# Altium PCB Inc_filter_v2.PcbDoc (part 3 of 4)
Units mm, origin at the board's own origin, x right, y up, seen from the top; angles counter-clockwise.
Board outline 339.6 x 339.6 mm, 2 copper layers (Top Layer, Bottom Layer); 640 components, 290 nets, 1708 pads, 357 vias.
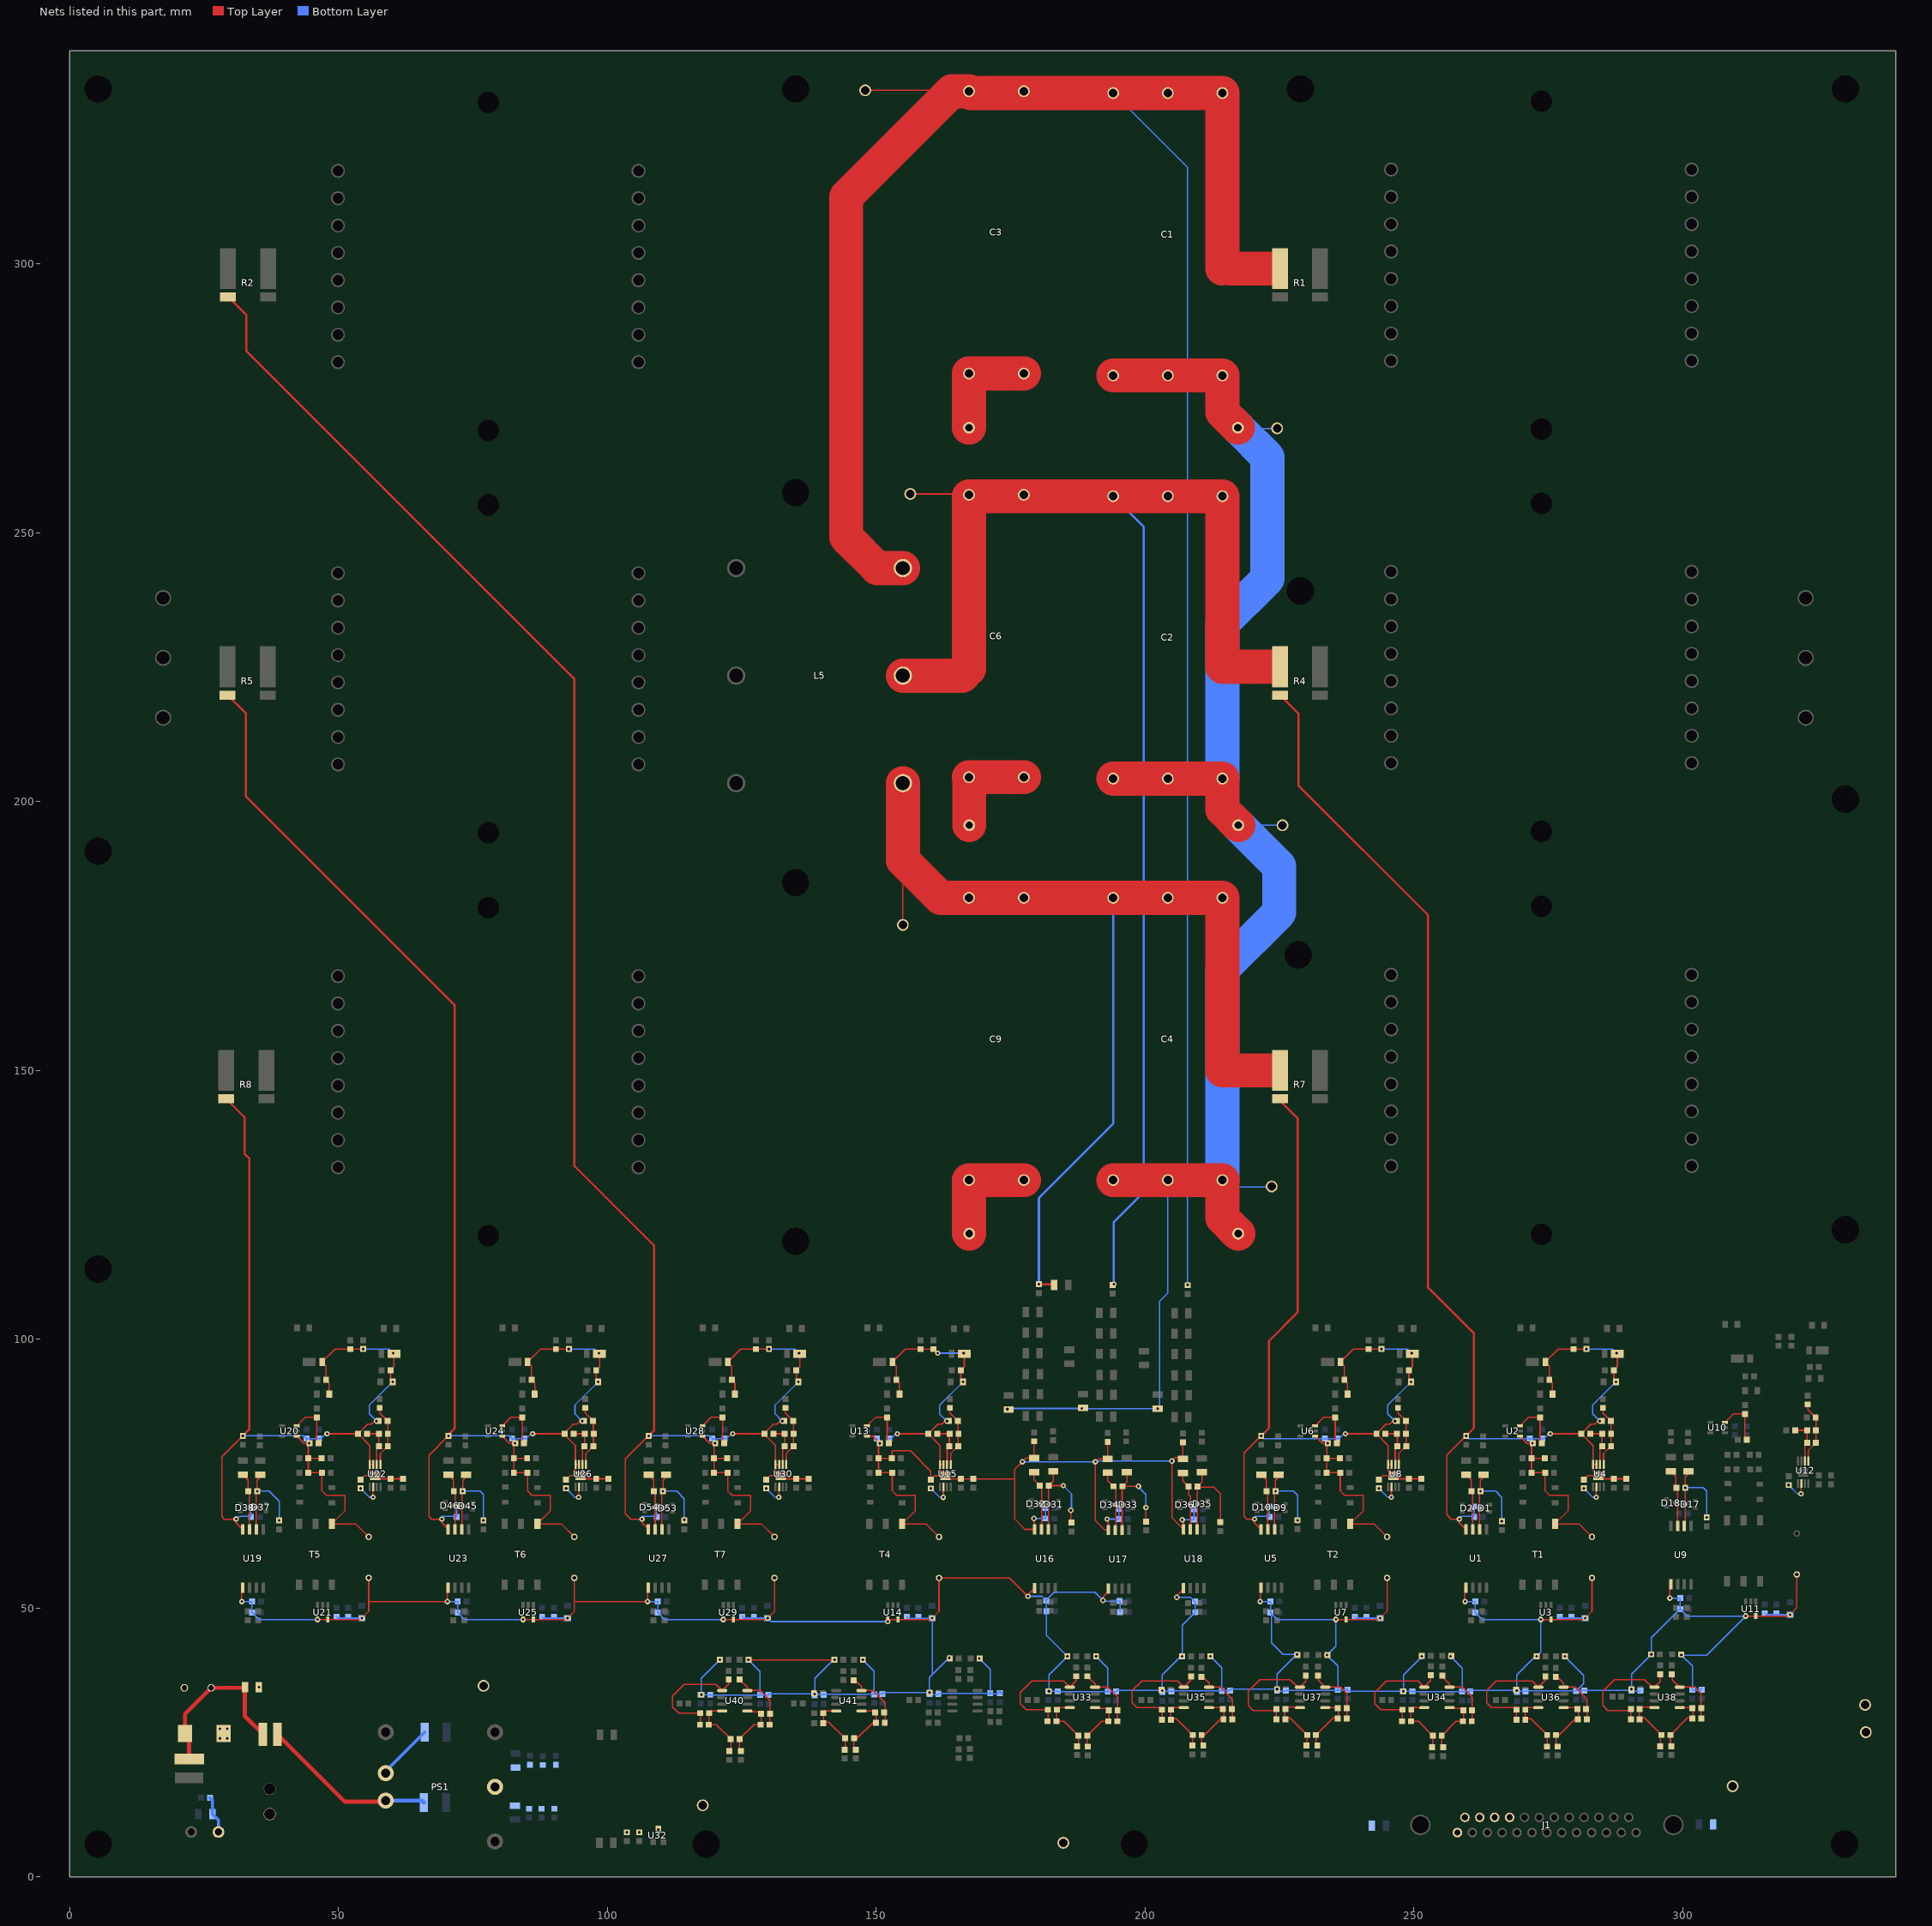
[diagram p3: the nets of this part, all layers, seen from the top]

## Via types
v1: diameter 1.016, hole 0.508, Top Layer to Bottom Layer, 354 vias
v2: diameter 1.27, hole 0.762, Top Layer to Bottom Layer, 3 vias

## Nets (pads, with @x,y where several pads share a name; then routed paths per layer and width w, separated by ;. In a path a pad name is that pad's centre, name@x,y a point inside that pad or via, vN(x,y) a via of type N, cw(c..) or ccw(c..) an arc to the next point about the centre after c; other vN are vias at no path point) (continued)
GND_IA2: C170.1 C172.1 C175.2 C179.1 C180.1 C181.1 C182.1 C183.1 C184.2 C185.2 C186.1 C187.1 C188.1 C189.1 C191.1 C192.1 C193.1 C194.1 D57.2 D60.1 FB27.1 R2.2 R94.1 R100.1 R102.1 T7.4 U27.4 U28.1 U30.3 U30.4 U30.9 | length 391.2
  Top Layer w0.2: U27.4@107.62,64.671 106.426,65.865 v1(106.426,66.548) 104.394,66.548 103.378,67.564 103.378,77.747 v1(107.671,82.04) ; U28.1@117.689,81.981 119.025,80.645 v1(120.015,80.645)
  Top Layer w0.254: v1(120.015,80.645) 120.015,80.574 119.831,80.39 C180.1@119.831,77.851 ; C185.2@122.309,77.851 C180.1@119.831,77.851 ; v1(123.324,82.423) R94.1@129.103,82.423 ; C183.1@123.712,89.789 123.712,91.877 C182.1@123.133,92.456 123.133,95.022 D57.2@122.397,95.758 124.81,98.171 R100.1@127.642,98.171 R100.1@127.642,98.171 R102.1@130.055,98.172 130.054,98.171 v1(130.048,98.171) ; C194.1@129.547,73.913 130.251,74.617 U30.9@132.255,74.617 ; C175.2@131.071,63.246 128.651,65.666 T7.4@124.215,65.666 126.626,68.077 126.626,70.993 123.197,70.993 122.372,71.818 C184.2@122.372,75.184 C179.1@119.831,75.184 C180.1@119.831,77.851 ; U30.3@131.999,76.648 U30.3@131.93,76.717 U30.4@131.28,76.717 ; C193.1@132.913,84.836 132.849,84.772 v1(132.532,84.772) 132.341,84.963 131.579,84.201 130.881,84.201 R94.1@129.103,82.423 ; C192.1@135.262,91.821 v1(135.516,92.075) 135.135,92.456 C191.1@135.135,94.234 135.77,94.869 D60.1@135.77,97.282 v1(135.643,97.409) ; C189.1@137.421,74.041 132.831,74.041 U30.9@132.255,74.617 ; R94.1@129.103,82.423 131.28,80.246 U30.4@131.28,76.717 ; U30.4@131.28,76.717 131.28,75.592 U30.9@132.255,74.617
  Top Layer w0.4: R2.2@29.464,293.825 32.893,290.396 32.893,283.754 93.885,222.762 93.885,132.211 108.712,117.384 108.712,83.081 v1(107.671,82.04)
  Bottom Layer w0.2: v1(106.426,66.548) 106.426,66.953 106.553,67.08 109.093,67.08 C172.1@109.195,66.979 C170.1@109.195,68.909 ; v1(107.671,82.04) 119.002,82.04 119.507,81.535 C186.1@119.514,81.535 C187.1@121.8,81.535
  Bottom Layer w0.254: C186.1@119.514,81.535 119.514,81.217 120.015,80.716 v1(120.015,80.645) ; C187.1@121.8,81.535 122.182,81.535 123.07,82.423 v1(123.324,82.423) ; v1(130.048,98.171) 134.881,98.171 v1(135.643,97.409) ; v1(132.532,84.772) 131.198,86.106 131.198,87.757 v1(135.516,92.075)
GND_IB1: C10.1 C12.1 C15.2 C19.1 C20.1 C21.1 C22.1 C23.1 C24.2 C25.2 C26.1 C27.1 C28.1 C29.1 C31.1 C32.1 C33.1 C34.1 D5.2 D8.1 FB2.1 R4.2 R15.1 R17.1 R27.1 T1.4 U1.4 U2.1 U4.3 U4.4 U4.9 | length 298.5
  Top Layer w0.2: U1.4@259.639,64.671 258.445,65.865 v1(258.445,66.548) 256.921,66.548 256.11,67.359 256.11,78.46 v1(259.69,82.04) ; U2.1@269.708,81.981 271.044,80.645 v1(272.034,80.645)
  Top Layer w0.254: v1(272.034,80.645) 272.034,80.574 271.85,80.39 C20.1@271.85,77.851 ; C25.2@274.328,77.851 C20.1@271.85,77.851 ; v1(275.343,82.423) R27.1@281.115,82.423 R27.1@281.122,82.423 ; C23.1@275.731,89.789 275.731,91.877 C22.1@275.152,92.456 275.152,95.022 D5.2@274.416,95.758 276.829,98.171 R15.1@279.661,98.171 R15.1@279.661,98.171 R17.1@282.074,98.172 282.073,98.171 v1(282.067,98.171) ; C34.1@281.566,73.913 282.27,74.617 U4.9@284.274,74.617 ; C15.2@283.09,63.246 280.67,65.666 T1.4@276.234,65.666 278.645,68.077 278.645,70.993 275.216,70.993 274.391,71.818 C24.2@274.391,75.184 C19.1@271.85,75.184 C20.1@271.85,77.851 ; U4.3@284.018,76.648 U4.3@283.949,76.717 U4.4@283.299,76.717 ; C33.1@284.932,84.836 284.868,84.772 v1(284.551,84.772) 284.36,84.963 283.598,84.201 282.9,84.201 R27.1@281.122,82.423 ; C32.1@287.281,91.821 v1(287.535,92.075) 287.154,92.456 C31.1@287.154,94.234 287.789,94.869 D8.1@287.789,97.282 v1(287.662,97.409) ; C29.1@289.44,74.041 284.85,74.041 U4.9@284.274,74.617 ; R27.1@281.122,82.423 283.299,80.246 U4.4@283.299,76.717 ; U4.4@283.299,76.717 283.299,75.592 U4.9@284.274,74.617
  Top Layer w0.4: R4.2@225.067,219.784 228.505,216.346 228.505,202.95 252.603,178.852 252.603,109.601 261.144,101.06 261.144,83.494 v1(259.69,82.04)
  Bottom Layer w0.2: v1(258.445,66.548) 258.445,66.953 258.572,67.08 261.112,67.08 C12.1@261.214,66.979 C10.1@261.214,68.909 ; v1(259.69,82.04) 260.195,81.535 C26.1@271.533,81.535 C27.1@273.819,81.535
  Bottom Layer w0.254: C26.1@271.533,81.535 271.533,81.217 272.034,80.716 v1(272.034,80.645) ; C27.1@273.819,81.535 274.201,81.535 275.089,82.423 v1(275.343,82.423) ; v1(282.067,98.171) 286.9,98.171 v1(287.662,97.409) ; v1(284.551,84.772) 283.217,86.106 283.217,87.757 v1(287.535,92.075)
GND_IB2: C145.1 C147.1 C150.2 C154.1 C155.1 C156.1 C157.1 C158.1 C159.2 C160.2 C161.1 C162.1 C163.1 C164.1 C166.1 C167.1 C168.1 C169.1 D49.2 D52.1 FB23.1 R5.2 R91.1 R93.1 R103.1 T6.4 U23.4 U24.1 U26.3 U26.4 U26.9 | length 301.2
  Top Layer w0.2: U23.4@70.402,64.671 69.208,65.865 v1(69.208,66.548) 67.31,66.548 66.802,67.056 66.802,78.389 v1(70.453,82.04) ; U24.1@80.471,81.981 81.807,80.645 v1(82.797,80.645)
  Top Layer w0.254: v1(82.797,80.645) 82.797,80.574 82.613,80.39 C155.1@82.613,77.851 ; C160.2@85.091,77.851 C155.1@82.613,77.851 ; v1(86.106,82.423) R103.1@91.885,82.423 ; C158.1@86.494,89.789 86.494,91.877 C157.1@85.915,92.456 85.915,95.022 D49.2@85.179,95.758 87.592,98.171 R91.1@90.424,98.171 R91.1@90.424,98.171 R93.1@92.837,98.172 R93.1@92.837,98.172 v1(92.83,98.171) ; C169.1@92.329,73.913 93.033,74.617 U26.9@95.037,74.617 ; C150.2@93.853,63.246 91.433,65.666 T6.4@86.997,65.666 89.408,68.077 89.408,70.993 85.979,70.993 85.154,71.818 C159.2@85.154,75.184 C154.1@82.613,75.184 C155.1@82.613,77.851 ; U26.3@94.781,76.648 U26.3@94.712,76.717 U26.4@94.062,76.717 ; C168.1@95.695,84.836 95.631,84.772 v1(95.314,84.772) 95.123,84.963 94.361,84.201 93.663,84.201 R103.1@91.885,82.423 ; C167.1@98.044,91.821 v1(98.298,92.075) 97.917,92.456 C166.1@97.917,94.234 98.552,94.869 D52.1@98.552,97.282 v1(98.425,97.409) ; C164.1@100.203,74.041 95.613,74.041 U26.9@95.037,74.617 ; R103.1@91.885,82.423 94.062,80.246 U26.4@94.062,76.717 ; U26.4@94.062,76.717 94.062,75.592 U26.9@95.037,74.617
  Top Layer w0.4: R5.2@29.36,219.784 32.798,216.346 32.798,200.918 71.625,162.091 71.625,83.436 70.453,82.264 v1(70.453,82.04)
  Bottom Layer w0.2: v1(69.208,66.548) 69.208,66.953 69.335,67.08 71.875,67.08 C147.1@71.977,66.979 C145.1@71.977,68.909 ; v1(70.453,82.04) 81.784,82.04 82.289,81.535 C161.1@82.296,81.535 C162.1@84.582,81.535
  Bottom Layer w0.254: C161.1@82.296,81.535 82.296,81.217 82.797,80.716 v1(82.797,80.645) ; C162.1@84.582,81.535 84.964,81.535 85.852,82.423 v1(86.106,82.423) ; v1(92.83,98.171) 97.663,98.171 v1(98.425,97.409) ; v1(95.314,84.772) 93.98,86.106 93.98,87.757 v1(98.298,92.075)
GND_IC1: C35.1 C37.1 C40.2 C44.1 C45.1 C46.1 C47.1 C48.1 C49.2 C50.2 C51.1 C52.1 C53.1 C54.1 C56.1 C57.1 C58.1 C59.1 D13.2 D16.1 FB6.1 R7.2 R18.1 R24.1 R26.1 T2.4 U5.4 U6.1 U8.3 U8.4 U8.9 | length 211.7
  Top Layer w0.2: U5.4@221.539,64.671 220.345,65.865 v1(220.345,66.548) 218.948,66.548 218.391,67.105 218.391,78.841 v1(221.59,82.04) ; U6.1@231.608,81.981 232.944,80.645 v1(233.934,80.645)
  Top Layer w0.254: v1(233.934,80.645) 233.934,80.574 233.75,80.39 C45.1@233.75,77.851 ; C50.2@236.228,77.851 C45.1@233.75,77.851 ; v1(237.243,82.423) R18.1@243.022,82.423 ; C48.1@237.631,89.789 237.631,91.877 C47.1@237.052,92.456 237.052,95.022 D13.2@236.316,95.758 238.729,98.171 R24.1@241.561,98.171 R24.1@241.561,98.171 R26.1@243.974,98.172 243.973,98.171 v1(243.967,98.171) ; C59.1@243.466,73.913 244.17,74.617 U8.9@246.174,74.617 ; C40.2@244.99,63.246 242.57,65.666 T2.4@238.134,65.666 240.545,68.077 240.545,70.993 237.116,70.993 236.291,71.818 C49.2@236.291,75.184 C44.1@233.75,75.184 C45.1@233.75,77.851 ; U8.3@245.918,76.648 U8.3@245.849,76.717 U8.4@245.199,76.717 ; C58.1@246.832,84.836 246.768,84.772 v1(246.451,84.772) 246.26,84.963 245.498,84.201 244.8,84.201 R18.1@243.022,82.423 ; C57.1@249.181,91.821 v1(249.435,92.075) 249.054,92.456 C56.1@249.054,94.234 249.689,94.869 D16.1@249.689,97.282 v1(249.562,97.409) ; C54.1@251.34,74.041 246.75,74.041 U8.9@246.174,74.617 ; R18.1@243.022,82.423 245.199,80.246 U8.4@245.199,76.717 ; U8.4@245.199,76.717 245.199,75.592 U8.9@246.174,74.617
  Top Layer w0.4: v1(221.59,82.04) 223.012,83.462 223.012,99.655 228.346,104.989 228.346,141.097 225.067,144.376 R7.2@225.067,144.727
  Bottom Layer w0.2: v1(220.345,66.548) 220.345,66.953 220.472,67.08 223.012,67.08 C37.1@223.114,66.979 C35.1@223.114,68.909 ; v1(221.59,82.04) 222.095,81.535 C51.1@233.433,81.535 C52.1@235.719,81.535
  Bottom Layer w0.254: C51.1@233.433,81.535 233.433,81.217 233.934,80.716 v1(233.934,80.645) ; C52.1@235.719,81.535 236.101,81.535 236.989,82.423 v1(237.243,82.423) ; v1(243.967,98.171) 248.8,98.171 v1(249.562,97.409) ; v1(246.451,84.772) 245.117,86.106 245.117,87.757 v1(249.435,92.075)
GND_IC2: C120.1 C122.1 C125.2 C129.1 C130.1 C131.1 C132.1 C133.1 C134.2 C135.2 C136.1 C137.1 C138.1 C139.1 C141.1 C142.1 C143.1 C144.1 D41.2 D44.1 FB19.1 R8.2 R82.1 R84.1 R92.1 T5.4 U19.4 U20.1 U22.3 U22.4 U22.9 | length 210.8
  Top Layer w0.2: U19.4@32.175,64.671 30.981,65.865 v1(30.981,66.548) 28.829,66.548 28.321,67.056 28.321,78.135 v1(32.226,82.04) ; U20.1@42.244,81.981 43.58,80.645 v1(44.57,80.645)
  Top Layer w0.254: v1(44.57,80.645) 44.57,80.574 44.386,80.39 C130.1@44.386,77.851 ; C135.2@46.864,77.851 C130.1@44.386,77.851 ; v1(47.879,82.423) R92.1@53.658,82.423 ; C133.1@48.267,89.789 48.267,91.877 C132.1@47.688,92.456 47.688,95.022 D41.2@46.952,95.758 49.365,98.171 R82.1@52.197,98.171 R82.1@52.197,98.171 R84.1@54.61,98.172 R84.1@54.61,98.172 v1(54.603,98.171) ; C144.1@54.102,73.913 54.806,74.617 U22.9@56.81,74.617 ; C125.2@55.626,63.246 53.206,65.666 T5.4@48.77,65.666 51.181,68.077 51.181,70.993 47.752,70.993 46.927,71.818 C134.2@46.927,75.184 C129.1@44.386,75.184 C130.1@44.386,77.851 ; U22.3@56.554,76.648 U22.3@56.485,76.717 U22.4@55.835,76.717 ; C143.1@57.468,84.836 57.404,84.772 v1(57.087,84.772) 56.896,84.963 56.134,84.201 55.436,84.201 R92.1@53.658,82.423 ; C142.1@59.817,91.821 v1(60.071,92.075) 59.69,92.456 C141.1@59.69,94.234 60.325,94.869 D44.1@60.325,97.282 v1(60.198,97.409) ; C139.1@61.976,74.041 57.386,74.041 U22.9@56.81,74.617 ; R92.1@53.658,82.423 55.835,80.246 U22.4@55.835,76.717 ; U22.4@55.835,76.717 55.835,75.592 U22.9@56.81,74.617
  Top Layer w0.4: R8.2@29.106,144.727 32.544,141.289 32.544,134.461 32.816,134.189 32.852,134.189 33.401,133.64 33.401,83.215 v1(32.226,82.04)
  Bottom Layer w0.2: v1(30.981,66.548) 30.981,66.953 31.034,67.007 31.705,67.007 31.779,67.08 33.648,67.08 C122.1@33.75,66.979 C120.1@33.75,68.909 ; v1(32.226,82.04) 43.557,82.04 44.062,81.535 C136.1@44.069,81.535 C137.1@46.355,81.535
  Bottom Layer w0.254: C136.1@44.069,81.535 44.069,81.217 44.57,80.716 v1(44.57,80.645) ; C137.1@46.355,81.535 46.737,81.535 47.625,82.423 v1(47.879,82.423) ; v1(54.603,98.171) 59.436,98.171 v1(60.198,97.409) ; v1(57.087,84.772) 55.753,86.106 55.753,87.757 v1(60.071,92.075)
GND_LV: C11.2 C13.2 C15.1 C16.1 C17.1 C18.1 C36.2 C38.2 C40.1 C41.1 C42.1 C43.1 C61.2 C63.2 C65.1 C66.1 C67.1 C68.1 C85.1 C86.1 C87.1 C88.1 C106.2 C108.2 C111.2 C113.2 C116.2 C118.2 C121.2 C123.2 C125.1 C126.1 C127.1 C128.1 C146.2 C148.2 C150.1 C151.1 C152.1 C153.1 C171.2 C173.2 C175.1 C176.1 C177.1 C178.1 C196.1 C197.2 C200.1 C201.1 C202.1 C203.2 C204.2 C205.2 C208.1 C209.1 C212.1 C213.1 C214.1 C215.1 C216.1 C217.1 C218.2 C219.2 C220.2 C221.2 C226.1 C227.1 C228.1 C229.1 C230.1 C231.1 C232.2 C233.2 C234.2 C235.2 C240.1 C241.1 C242.1 C243.1 C244.1 C245.1 C246.2 C247.2 C248.2 C249.2 C255.1 C256.1 C257.1 C258.2 C259.2 C262.1 C263.1 C264.1 C265.2 C266.2 C269.1 C270.1 C271.1 C272.2 C273.2 J1.1 J1.22 J1.23 J1.24 J1.25 pad.2 pad.3 pad.4 PS1.4 R110.2 R111.2 R116.2 R118.2 R126.2 R127.2 R132.2 R134.2 R142.2 R143.2 R148.2 R150.2 R155.2 R158.2 R163.2 R166.2 R171.2 R174.2 R199.2 R200.1 TP7.1 TP8.1 TP9.1 TP10.1 TP11.1 TP12.1 U1.5 U3.4 U3.5 U5.5 U7.4 U7.5 U9.5 U11.4 U11.5 U14.4 U14.5 U16.5 U17.5 U18.5 U19.5 U21.4 U21.5 U23.5 U25.4 U25.5 U27.5 U29.4 U29.5 U32.3 | length 778.2
  Top Layer w0.2: v1(32.022,51.231) 32.022,53.618 U19.5@32.175,53.771 ; 55.626,51.181 55.676,51.231 v1(70.249,51.231) 70.249,53.618 U23.5@70.402,53.771 ; 93.853,51.181 93.903,51.231 v1(107.467,51.231) 107.467,53.618 U27.5@107.62,53.771 ; v1(120.905,40.387) R158.2@120.906,40.386 ; C85.1@161.671,55.619 174.789,55.619 v1(178.211,52.197) ; v1(163.577,40.767) R174.2@163.958,40.767 ; v1(185.547,41.022) v1(185.547,41.022) ; v1(221.386,51.231) 221.386,53.618 U5.5@221.539,53.771 ; v1(228.219,41.402) R148.2@228.6,41.402 ; v1(251.46,41.022) v1(251.46,41.022) ; v1(259.486,51.231) 259.486,53.618 U1.5@259.639,53.771 ; v1(294.132,41.402) R150.2@294.513,41.402 ; v1(297.579,51.866) 297.579,54.253 U9.5@297.732,54.406
  Top Layer w0.254: v1(46.106,47.879) U21.5@48.006,47.879 54.102,47.879 v1(54.356,48.133) 55.626,49.403 55.626,51.181 C125.1@55.626,55.626 ; v1(84.333,47.879) U25.5@86.233,47.879 92.329,47.879 v1(92.583,48.133) 93.853,49.403 93.853,51.181 C150.1@93.853,55.626 ; v1(121.551,47.879) U29.5@123.451,47.879 129.547,47.879 v1(129.801,48.133) 131.071,49.403 C175.1@131.071,55.626 ; v1(126.239,40.386) v1(142.242,40.386) ; U14.4@152.151,47.872 U14.5@154.051,47.872 160.147,47.872 v1(160.401,48.126) 161.671,49.396 C85.1@161.671,55.619 ; v1(178.211,52.197) 178.211,52.473 U16.5@179.481,53.743 ; v1(192.151,51.435) 192.151,52.09 193.166,53.105 U17.5@193.166,53.615 ; v1(205.867,52.006) 205.867,52.282 U18.5@207.137,53.552 ; v1(235.47,47.879) U7.5@237.37,47.879 243.466,47.879 v1(243.72,48.133) 244.99,49.403 C40.1@244.99,55.626 ; v1(273.558,47.879) U3.4@273.57,47.879 U3.5@275.47,47.879 281.566,47.879 v1(281.82,48.133) 283.09,49.403 C15.1@283.09,55.626 ; v1(311.663,48.514) U11.5@313.563,48.514 319.659,48.514 v1(319.913,48.768) 321.183,50.038 C65.1@321.183,56.261
  Top Layer w0.4: v1(152.151,47.498) U14.4@152.151,47.872
  Bottom Layer w0.2: v1(32.022,51.231) C123.2@33.941,51.231 C121.2@33.941,49.199 35.26,47.879 v1(46.106,47.879) ; v1(70.249,51.231) C148.2@72.168,51.231 C146.2@72.168,49.199 73.487,47.879 v1(84.333,47.879) ; v1(107.467,51.231) C173.2@109.386,51.231 C171.2@109.386,49.199 110.705,47.879 v1(121.551,47.879) 122.059,47.879 ; v1(120.905,40.387) 117.477,36.959 v1(117.477,33.909) v1(117.477,33.909) C257.1@119.127,33.908 119.19,33.845 C258.2@128.398,33.845 ; v1(126.239,40.386) 128.398,38.227 C258.2@128.398,33.845 ; v1(142.242,40.386) 141.987,40.386 138.558,36.957 v1(138.558,34.037) ; v1(147.511,40.386) 149.607,38.29 149.607,34.162 C265.2@149.702,34.067 ; C265.2@149.607,33.972 140.146,33.972 140.082,33.908 138.687,33.908 v1(138.558,34.037) ; C265.2@149.733,34.036 C266.2@151.131,34.035 151.385,34.29 v1(159.895,34.29) ; C271.1@161.545,33.908 160.277,33.908 v1(159.895,34.29) ; C271.1@161.545,34.035 161.672,34.162 C273.2@171.197,34.162 ; v1(163.577,40.767) 159.895,37.085 v1(159.895,34.29) ; v1(169.165,40.64) 171.197,38.608 C273.2@171.197,34.162 ; C272.2@172.975,34.48 172.531,34.036 171.197,34.036 C273.2@171.197,34.162 ; C108.2@181.577,51.435 183.101,52.959 190.627,52.959 v1(192.151,51.435) ; v1(185.547,41.022) 182.119,37.594 v1(182.119,34.544) 182.12,34.543 C215.1@183.769,34.543 183.832,34.48 C218.2@193.04,34.48 ; v1(190.881,41.021) 193.04,38.862 C218.2@193.04,34.48 ; C229.1@204.724,34.543 203.329,34.543 v1(203.2,34.672) ; C229.1@204.851,34.48 204.978,34.607 C232.2@214.249,34.607 ; C116.2@209.297,49.212 206.884,46.799 v1(206.884,41.021) 206.629,41.021 203.2,37.592 v1(203.2,34.672) ; v1(212.153,41.021) 214.249,38.925 214.249,34.797 C232.2@214.344,34.702 ; C232.2@214.375,34.671 C233.2@215.773,34.67 ; C233.2@215.773,34.67 216.028,34.925 v1(224.537,34.925) ; v1(221.386,51.231) C38.2@223.305,51.231 C36.2@223.305,49.199 C36.2@223.52,48.983 ; C243.1@226.187,34.543 224.919,34.543 v1(224.537,34.925) ; C243.1@226.187,34.67 235.838,34.67 C247.2@235.839,34.671 ; C246.2@237.617,34.797 237.87,34.544 v1(248.032,34.544) ; C246.2@237.617,35.115 237.173,34.671 C247.2@235.839,34.671 ; v1(251.46,41.022) 248.032,37.594 v1(248.032,34.544) ; v1(256.794,41.021) 258.953,38.862 C220.2@258.953,34.48 ; v1(259.486,51.231) C13.2@261.405,51.231 C11.2@261.405,49.199 262.724,47.879 v1(273.558,47.879) 273.558,41.806 273.57,41.794 v1(272.797,41.021) 272.542,41.021 269.113,37.592 v1(269.113,34.672) ; C231.1@270.637,34.543 269.242,34.543 v1(269.113,34.672) ; C231.1@270.764,34.48 270.891,34.607 C234.2@280.162,34.607 ; v1(278.066,41.021) 281.559,37.528 281.559,36.004 C234.2@280.257,34.702 ; C234.2@280.288,34.671 C235.2@281.686,34.67 ; C235.2@281.686,34.67 290.195,34.67 v1(290.45,34.925) 290.45,37.72 v1(294.132,41.402) 294.132,44.468 C61.2@299.498,49.834 ; C244.1@290.832,34.543 C245.1@292.1,34.543 ; v1(297.579,51.866) C63.2@299.498,51.866 C61.2@299.498,49.834 ; C248.2@303.53,35.115 303.086,34.671 301.752,34.671 C249.2@301.752,34.797 301.752,39.243 v1(299.72,41.275) 304.424,41.275 v1(311.663,48.514) 300.817,48.514 C61.2@299.498,49.834 ; C258.2@128.398,33.845 C259.2@129.922,33.845 130.114,34.037 v1(138.558,34.037) ; C218.2@193.04,34.48 C219.2@194.564,34.48 194.756,34.672 v1(203.2,34.672) ; C36.2@223.52,48.983 223.52,43.561 225.679,41.402 v1(228.219,41.402) 224.537,37.72 v1(224.537,34.925) ; C36.2@223.52,48.983 224.624,47.879 v1(235.47,47.879) 235.47,42.938 v1(233.807,41.275) 235.839,39.243 C247.2@235.839,34.797 C247.2@235.839,34.671 ; v1(248.032,34.544) 248.033,34.543 C217.1@249.682,34.543 249.745,34.48 C220.2@258.953,34.48 ; C220.2@258.953,34.48 260.223,34.48 260.415,34.672 v1(269.113,34.672)
  Bottom Layer w0.254: C128.1@49.657,48.387 49.911,48.133 v1(54.356,48.133) ; C153.1@87.884,48.387 88.138,48.133 v1(92.583,48.133) ; C178.1@125.102,48.387 125.356,48.133 v1(129.801,48.133) 130.436,47.498 v1(152.151,47.498) ; C88.1@155.702,48.38 155.956,48.126 v1(160.401,48.126) C87.1@160.401,48.119 160.401,37.846 ; v1(178.211,52.197) 180.815,52.197 C108.2@181.577,51.435 181.641,51.371 C106.2@181.641,49.403 181.641,44.928 v1(185.547,41.022) ; v1(192.151,51.435) 192.151,51.308 192.15,51.307 C113.2@195.262,51.307 195.326,51.243 C111.2@195.326,49.275 ; v1(205.867,52.006) 208.471,52.006 C118.2@209.233,51.244 209.297,51.18 C116.2@209.297,49.212 ; C43.1@239.021,48.387 239.275,48.133 v1(243.72,48.133) ; v1(273.558,47.879) 276.613,47.879 C18.1@277.121,48.387 277.375,48.133 v1(281.82,48.133) ; C68.1@315.214,49.022 315.468,48.768 v1(319.913,48.768)
  Bottom Layer w0.4: C272.2@172.975,34.48 C272.2@173.292,34.163
GND_PH: C85.2 C89.1 C90.1 C91.1 C92.1 C93.1 C94.2 C95.2 C96.1 C97.1 C98.1 C99.1 C101.1 C102.1 C103.1 C104.1 C105.1 C107.1 C110.1 C112.1 C115.1 C117.1 D27.2 D30.1 R37.1 R39.1 R40.1 R51.1 R52.1 R63.1 R64.1 R75.1 R76.1 T4.4 U13.1 U15.3 U15.4 U15.9 U16.4 U17.4 U18.4 | length 230.6
  Top Layer w0.2: C95.2@152.909,77.844 152.909,79.247 156.338,79.247 160.147,75.438 C104.1@160.147,73.906
  Top Layer w0.254: U13.1@148.289,81.974 149.35,81.974 v1(150.686,80.638) 150.431,80.383 C90.1@150.431,77.844 ; C95.2@152.909,77.844 C90.1@150.431,77.844 ; v1(153.924,82.416) R40.1@159.703,82.416 ; C93.1@154.312,89.782 154.312,91.87 C92.1@153.733,92.449 153.733,95.015 D27.2@152.997,95.751 155.41,98.164 R37.1@158.242,98.164 158.243,98.165 R39.1@160.655,98.165 v1(161.418,97.402) ; C104.1@160.147,73.906 160.851,74.61 U15.9@162.855,74.61 ; C85.2@161.671,63.239 159.251,65.659 T4.4@154.815,65.659 157.226,68.07 157.226,70.986 153.797,70.986 152.972,71.811 C94.2@152.972,75.177 C89.1@150.431,75.177 C90.1@150.431,77.844 ; U15.3@162.599,76.641 U15.3@162.53,76.71 U15.4@161.88,76.71 ; C103.1@163.513,84.829 163.449,84.765 v1(163.132,84.765) 162.941,84.956 162.179,84.194 161.481,84.194 R40.1@159.703,82.416 ; C102.1@165.862,91.814 v1(166.116,92.068) 165.735,92.449 C101.1@165.735,94.227 166.37,94.862 D30.1@166.37,97.275 v1(166.243,97.402) ; v1(179.324,66.675) 179.324,64.8 U16.4@179.481,64.643 177.673,64.643 175.768,66.548 175.768,74.168 ; R51.1@179.354,81.027 R52.1@179.354,77.911 177.86,77.911 v1(177.165,77.216) 175.768,75.819 175.768,74.168 ; v1(192.913,66.548) 192.913,66.167 193.166,65.914 U17.4@193.166,64.515 192.533,64.515 190.754,66.294 v1(190.754,77.216) 191.321,77.783 R64.1@193.039,77.783 R63.1@193.039,80.899 ; v1(206.883,66.421) 207.137,66.167 U18.4@207.137,64.621 204.978,66.78 v1(204.978,77.343) 205.613,77.978 207.01,77.978 R75.1@207.01,80.836 ; R40.1@159.703,82.416 161.88,80.239 U15.4@161.88,76.71 ; U15.4@161.88,76.71 161.88,75.585 U15.9@162.855,74.61 ; U15.9@162.855,74.61 163.431,74.034 C99.1@168.021,74.034 175.634,74.034 175.768,74.168
  Bottom Layer w0.254: C96.1@150.114,81.528 150.114,81.21 v1(150.686,80.638) ; C97.1@152.4,81.528 152.782,81.528 153.67,82.416 v1(153.924,82.416) ; v1(161.418,97.402) v1(166.243,97.402) ; v1(163.132,84.765) 161.798,86.099 161.798,87.75 v1(166.116,92.068) ; v1(177.165,77.216) v1(190.754,77.216) 190.627,77.343 v1(204.978,77.343) ; v1(179.324,66.675) 181.196,66.675 181.323,66.802 C105.1@181.45,66.675 C107.1@181.45,68.58 ; v1(192.913,66.548) 195.134,66.548 C110.1@195.135,66.547 C112.1@195.135,68.452 ; v1(206.883,66.421) 209.043,66.421 C115.1@209.106,66.484 C117.1@209.106,68.389
GND_PWR: C5.2 C7.1 C195.1 C275.2 C276.2 D61.2 P1.2 pad.6 pad.7 pad.8 pad.9 pad.10 PS1.1 SW1.1 | length 17.6
  Bottom Layer w0.6: C276.2@26.098,14.732 26.573,14.257 C275.2@26.573,11.684 27.686,10.571 P1.2@27.686,8.382 ; PS1.1@58.801,19.304 58.801,19.703 C195.1@66.022,26.924
N_HV: C1.1 C1.2 C1.3 C2.1 C2.2 C2.3 C4.1 C4.2 C4.3 R3.1 R6.1 R9.1 R203.1 R206.1 R207.1 TP4.1 TP5.1 TP6.1 | length 334.6
  Top Layer w6.35: C4.1@194.066,129.587 C4.2@204.216,129.587 C4.3@214.366,129.587 214.366,122.565 R9.1@217.297,119.634 ; C2.1@194.066,204.255 C2.2@204.216,204.255 C2.3@214.366,204.255 214.366,198.511 R6.1@217.297,195.58 ; C1.1@194.066,279.22 C1.2@204.216,279.22 C1.3@214.366,279.22 214.366,272.387 R3.1@217.259,269.494
  Bottom Layer w0.254: v1(174.371,86.995) 174.498,87.122 v1(188.214,87.122) 188.244,87.092 v1(202.311,87.092) 202.438,86.965 202.438,86.868 202.692,87.122 202.692,107.061 204.216,108.585 C4.2@204.216,129.587 ; 214.366,128.27 TP6.1@224.409,128.27 ; R6.1@217.297,195.58 TP5.1@225.552,195.58 ; R3.1@217.386,269.367 TP4.1@224.536,269.367
  Bottom Layer w6.35: C4.3@214.366,129.587 214.366,168.773 224.917,179.324 224.917,187.96 R6.1@217.297,195.58 ; C2.3@214.366,204.255 214.366,233.035 222.758,241.427 222.758,263.995 217.386,269.367 R3.1@217.259,269.494
NetC1_4: C1.4 C1.5 C1.6 C3.3 C3.4 FB17.1 L5.3 R1.1 TP1.1 | length 435.5
  Top Layer w0.254: TP1.1@147.955,332.232 160.997,332.232 161.417,331.812
  Top Layer w0.4: FB17.1@207.899,110.045 v1(207.899,110.109)
  Top Layer w6.35: L5.3@154.952,243.393 150.18,243.393 144.399,249.174 144.399,312.42 164.045,332.066 C3.4@167.239,332.066 167.585,331.72 C1.6@194.066,331.72 C1.5@204.216,331.72 C1.4@214.366,331.72 214.366,299.095 ; 215.9,299.085 223.266,299.085
  Bottom Layer w0.254: C1.6@194.066,331.72 207.899,317.887 v1(207.899,110.109)
NetC2_4: C2.4 C2.5 C2.6 C6.3 C6.4 FB16.1 L5.2 R4.1 TP2.1 | length 296
  Top Layer w0.254: TP2.1@156.337,257.175 168.186,257.175 C6.4@168.255,257.244
  Top Layer w0.4: FB16.1@194.056,110.109 v1(194.183,110.236)
  Top Layer w6.35: L5.2@154.952,223.393 165.989,223.393 167.239,224.643 167.239,256.755 C2.6@194.066,256.755 C2.5@204.216,256.755 C2.4@214.366,256.755 214.366,225.044 223.266,225.044
  Bottom Layer w0.4: C2.6@194.066,256.755 199.771,251.05 199.771,127.381 194.183,121.793 v1(194.183,110.236)
NetC3_1: C3.1 C3.2 R3.2 | length 20.3
  Top Layer w6.35: R3.2@167.259,269.494 167.259,279.546 C3.1@167.239,279.566 C3.2@177.439,279.566
NetC4_4: C4.4 C4.5 C4.6 C9.3 C9.4 FB15.1 L5.1 R7.1 R201.1 TP3.1 | length 206.1
  Top Layer w0.254: TP3.1@154.94,177.038 154.94,184.404 155.321,184.785
  Top Layer w0.4: FB15.1@180.213,110.236 v1(180.243,110.236) 182.947,110.236 R201.1@183.074,110.109
  Top Layer w6.35: L5.1@154.952,203.393 154.952,189.091 161.956,182.087 C9.4@167.239,182.087 C9.3@177.439,182.087 C4.6@194.066,182.087 C4.5@204.216,182.087 C4.4@214.366,182.087 214.366,149.987 223.393,149.987
  Bottom Layer w0.4: v1(180.243,110.236) 180.243,126.268 194.066,140.091 C4.6@194.066,182.087
NetC5_1: C5.1 C7.2 D61.1 L8.2 L9.1 | length 32
  Top Layer w0.762: L8.2@22.225,21.915 22.225,25.908 D61.1@21.463,26.67 21.463,30.306 C5.1@26.336,35.179 C7.2@32.609,35.179 ; C7.2@32.609,35.306 C7.2@32.609,35.179 ; L9.1@35.941,26.543 32.609,29.875 C7.2@32.609,35.179
NetC6_1: C6.1 C6.2 R6.2 | length 19.2
  Top Layer w6.35: R6.2@167.297,195.58 167.297,204.451 C6.1@167.239,204.509 C6.2@177.439,204.509
NetC8_1: C8.1 L9.2 PS1.2 | length 32.7
  Top Layer w0.762: L9.2@38.641,26.543 51.181,14.003 58.58,14.003 PS1.2@58.801,14.224
  Bottom Layer w0.762: PS1.2@58.801,14.224 65.514,14.224 C8.1@65.895,13.843
NetC9_1: C9.1 C9.2 R9.2 | length 20.2
  Top Layer w6.35: R9.2@167.297,119.634 167.239,119.692 C9.1@167.239,129.587 C9.2@177.439,129.587
NetC14_1: C14.1 D1.3 R10.1 R11.2 U1.2 | length 18.7
  Top Layer w0.2: U1.2@262.179,64.671 262.179,71.17 ; v1(262.343,71.754) 262.343,73.798 262.941,74.396 R11.2@262.941,74.802
  Bottom Layer w0.2: v1(262.343,71.754) 265.177,71.754 266.319,70.612 v1(266.319,66.167)
NetC14_2: C14.2 D2.3 R14.2 U1.3 | length 10.8
  Top Layer w0.2: R14.2@259.69,75.047 R14.2@259.69,74.802 260.61,73.881 260.61,71.837 C14.2@260.693,71.754 ; U1.3@260.909,64.671 C14.2@260.909,71.754
NetC21_2: C21.2 FB3.1 U2.3 | length 9.3
  Top Layer w0.254: U2.3@269.708,83.881 271.298,85.471 FB3.1@273.438,85.471 273.438,80.962 C21.2@273.755,80.645
NetC30_1: C30.1 C33.2 FB4.1 R25.2 U4.1 | length 11.7
  Top Layer w0.254: FB4.1@285.122,87.249 285.122,86.296 C33.2@286.582,84.836 286.645,84.773 R25.2@286.645,82.423 286.646,82.422 C30.1@286.646,80.137 285.249,78.74 U4.1@285.249,76.717
NetC30_2: C30.2 R25.1 R27.2 U4.2 | length 8.1
  Top Layer w0.254: R27.2@282.772,82.423 R25.1@284.995,82.423 R25.1@284.995,82.423 C30.2@284.996,80.137 284.599,79.74 U4.2@284.599,76.717
NetC34_2: C34.2 U4.6 | length 5
  Top Layer w0.254: v1(283.88,70.612) 283.88,72.448 U4.6@283.949,72.517
  Bottom Layer w0.254: v1(281.566,72.263) 283.273,70.556 283.329,70.612 v1(283.88,70.612)
NetC39_1: C39.1 D9.3 R19.1 R20.2 U5.2 | length 18.9
  Top Layer w0.2: U5.2@224.079,64.671 224.079,71.17 ; v1(224.243,71.754) 224.243,73.798 224.841,74.396 R20.2@224.841,74.802
  Bottom Layer w0.2: v1(224.243,71.754) 227.585,71.754 228.346,70.993 v1(228.346,66.294)
NetC39_2: C39.2 D10.3 R23.2 U5.3 | length 10.8
  Top Layer w0.2: R23.2@221.59,75.047 R23.2@221.59,74.802 222.51,73.881 222.51,71.837 C39.2@222.593,71.754 ; U5.3@222.809,64.671 C39.2@222.809,71.754
NetC46_2: C46.2 FB7.1 U6.3 | length 9.3
  Top Layer w0.254: U6.3@231.608,83.881 233.198,85.471 FB7.1@235.338,85.471 235.338,80.962 C46.2@235.655,80.645
NetC55_1: C55.1 C58.2 FB8.1 R16.2 U8.1 | length 11.7
  Top Layer w0.254: FB8.1@247.022,87.249 247.022,86.296 C58.2@248.482,84.836 248.545,84.773 248.545,82.423 248.546,82.422 C55.1@248.546,80.137 247.149,78.74 U8.1@247.149,76.717
NetC55_2: C55.2 R16.1 R18.2 U8.2 | length 8.1
  Top Layer w0.254: R18.2@244.672,82.423 R16.1@246.825,82.423 246.895,82.423 246.896,82.422 C55.2@246.896,80.137 246.499,79.74 U8.2@246.499,76.717
NetC59_2: C59.2 U8.6 | length 5
  Top Layer w0.254: v1(245.78,70.612) 245.78,72.448 U8.6@245.849,72.517
  Bottom Layer w0.254: v1(243.466,72.263) 245.173,70.556 245.229,70.612 v1(245.78,70.612)
NetC64_1: C64.1 D17.3 R28.1 R29.2 U9.2 | length 19.9
  Top Layer w0.2: U9.2@300.272,65.306 300.436,65.47 v1(300.436,72.389) 300.436,74.433 301.034,75.031 R29.2@301.034,75.437 ; v1(304.419,66.865) R28.1@304.419,67.183
  Bottom Layer w0.2: v1(300.436,72.389) 303.783,72.389 303.784,72.39 304.419,71.755 v1(304.419,66.865)
NetC64_2: C64.2 D18.3 R32.2 U9.3 | length 10.9
  Top Layer w0.2: R32.2@297.783,75.682 R32.2@297.783,75.437 298.703,74.516 298.703,72.472 C64.2@298.786,72.389 299.002,72.174 U9.3@299.002,65.306
NetC71_2: C71.2 FB11.1 U10.3 | length 9.3
  Top Layer w0.254: U10.3@307.801,84.516 309.391,86.106 FB11.1@311.531,86.106 311.531,81.597 C71.2@311.848,81.28
NetC80_1: C80.1 C83.2 FB12.1 R34.2 U12.1 | length 11.7
  Top Layer w0.254: FB12.1@323.215,87.884 323.215,86.931 C83.2@324.675,85.471 324.738,85.408 R34.2@324.738,83.058 R34.2@324.738,83.058 C80.1@324.739,80.772 323.342,79.375 U12.1@323.342,77.352
NetC80_2: C80.2 R34.1 R36.2 U12.2 | length 8.1
  Top Layer w0.254: R36.2@320.865,83.058 R34.1@323.088,83.058 R34.1@323.088,83.058 C80.2@323.089,80.772 322.692,80.375 U12.2@322.692,77.352
NetC84_2: C84.2 U12.6 | length 5
  Top Layer w0.254: v1(321.973,71.247) 321.973,73.083 U12.6@322.042,73.152
  Bottom Layer w0.254: v1(319.659,72.898) 321.366,71.191 321.422,71.247 v1(321.973,71.247)
NetC91_2: C91.2 FB13.1 U13.3 | length 9.3
  Top Layer w0.254: U13.3@148.289,83.874 149.879,85.464 FB13.1@152.019,85.464 152.019,80.955 C91.2@152.336,80.638
NetC100_1: C100.1 C103.2 FB14.1 R38.2 U15.1 | length 11.7
  Top Layer w0.254: FB14.1@163.703,87.242 163.703,86.289 C103.2@165.163,84.829 165.226,84.766 165.226,82.416 165.227,82.415 C100.1@165.227,80.13 163.83,78.733 U15.1@163.83,76.71
NetC100_2: C100.2 R38.1 R40.2 U15.2 | length 8.2
  Top Layer w0.254: R40.2@161.353,82.416 163.633,82.416 163.577,82.36 C100.2@163.577,80.13 163.18,79.733 U15.2@163.18,76.71
NetC104_2: C104.2 U15.6 | length 5
  Top Layer w0.254: v1(162.461,70.605) 162.461,72.441 U15.6@162.53,72.51
  Bottom Layer w0.254: v1(160.147,72.256) 161.854,70.549 161.91,70.605 v1(162.461,70.605)
NetC109_1: C109.1 D31.3 R41.1 R44.2 U16.2 | length 21.6
  Top Layer w0.254: U16.2@182.021,64.643 182.021,72.708 C109.1@182.084,72.771 ; R44.2@182.91,75.438 182.91,73.597 C109.1@182.084,72.771 ; v1(184.785,72.771) 182.338,72.771 182.211,72.644 C109.1@182.084,72.771 ; v1(186.182,68.199) 186.182,66.039 R41.1@186.309,65.912
  Bottom Layer w0.254: v1(184.785,72.771) 186.309,71.247 186.309,68.326 v1(186.182,68.199)
NetC109_2: C109.2 D32.3 R52.2 U16.3 | length 11.2
  Top Layer w0.2: C109.2@180.434,72.771 180.751,72.454 U16.3@180.751,64.643
  Top Layer w0.254: R52.2@179.354,75.311 179.354,73.851 C109.2@180.434,72.771
NetC114_1: C114.1 D33.3 R53.1 R56.2 U17.2 | length 21.4
  Top Layer w0.254: U17.2@195.706,64.515 195.706,72.58 C114.1@195.769,72.643 ; R56.2@196.595,75.31 196.595,73.469 C114.1@195.769,72.643 ; v1(198.755,72.644) v1(198.755,72.644) C114.1@195.769,72.643 ; R53.1@200.152,66.103 v1(200.152,68.707)
  Bottom Layer w0.254: v1(198.755,72.644) 198.628,72.644 200.152,71.12 v1(200.152,68.707)
NetC114_2: C114.2 D34.3 R64.2 U17.3 | length 11.4
  Top Layer w0.2: R64.2@193.039,75.183 193.039,73.723 C114.2@194.119,72.643 194.564,72.198 194.564,64.643 U17.3@194.436,64.515
NetC119_1: C119.1 D35.3 R65.1 R68.2 U18.2 | length 21.1
  Top Layer w0.254: U18.2@209.677,64.621 209.677,72.517 C119.1@209.74,72.58 ; R68.2@210.566,75.247 210.566,73.406 C119.1@209.74,72.58 ; R65.1@213.995,65.976 213.995,71.247 212.725,72.517 209.803,72.517 C119.1@209.74,72.58
NetC119_2: C119.2 D36.3 R76.2 U18.3 | length 11.1
  Top Layer w0.2: R76.2@207.01,75.12 207.01,73.66 C119.2@208.09,72.58 208.09,71.056 208.407,70.739 U18.3@208.407,64.621
NetC124_1: C124.1 D37.3 R77.1 R78.2 U19.2 | length 18.2
  Top Layer w0.2: U19.2@34.715,64.671 D37.3@34.715,68.707 34.715,71.17 ; v1(34.879,71.754) 34.879,73.798 35.477,74.396 R78.2@35.477,74.802
  Bottom Layer w0.2: v1(34.879,71.754) 37.085,71.754 38.989,69.85 v1(38.989,66.294)
NetC124_2: C124.2 D38.3 R81.2 U19.3 | length 10.8
  Top Layer w0.2: R81.2@32.226,75.047 R81.2@32.226,74.802 33.146,73.881 33.146,71.837 C124.2@33.229,71.754
  Top Layer w0.254: U19.3@33.445,64.671 C124.2@33.445,71.754
NetC131_2: C131.2 FB20.1 U20.3 | length 9.3
  Top Layer w0.254: U20.3@42.244,83.881 43.834,85.471 FB20.1@45.974,85.471 45.974,80.962 C131.2@46.291,80.645
NetC140_1: C140.1 C143.2 FB21.1 R83.2 U22.1 | length 11.7
  Top Layer w0.254: FB21.1@57.658,87.249 57.658,86.296 C143.2@59.118,84.836 59.181,84.773 R83.2@59.181,82.423 R83.2@59.181,82.423 C140.1@59.182,80.137 57.785,78.74 U22.1@57.785,76.717
NetC140_2: C140.2 R83.1 R92.2 U22.2 | length 8.1
  Top Layer w0.254: R92.2@55.308,82.423 R83.1@57.531,82.423 R83.1@57.531,82.423 C140.2@57.532,80.137 57.135,79.74 U22.2@57.135,76.717
NetC144_2: C144.2 U22.6 | length 5
  Top Layer w0.254: v1(56.416,70.612) 56.416,72.448 U22.6@56.485,72.517
  Bottom Layer w0.254: v1(54.102,72.263) 55.809,70.556 55.865,70.612 v1(56.416,70.612)
NetC149_1: C149.1 D45.3 R86.1 R87.2 U23.2 | length 18.7
  Top Layer w0.2: U23.2@72.942,64.671 72.942,71.17 ; v1(73.106,71.754) 73.106,73.798 73.704,74.396 R87.2@73.704,74.802
  Bottom Layer w0.2: v1(73.106,71.754) 76.328,71.754 76.962,71.12 v1(76.962,66.294)
NetC149_2: C149.2 D46.3 R90.2 U23.3 | length 10.8
  Top Layer w0.2: R90.2@70.453,75.047 R90.2@70.453,74.802 71.373,73.881 71.373,71.837 C149.2@71.456,71.754 ; U23.3@71.672,64.671 C149.2@71.672,71.754
NetC156_2: C156.2 FB24.1 U24.3 | length 9.3
  Top Layer w0.254: U24.3@80.471,83.881 82.061,85.471 FB24.1@84.201,85.471 84.201,80.962 C156.2@84.518,80.645
NetC165_1: C165.1 C168.2 FB25.1 R101.2 U26.1 | length 11.7
  Top Layer w0.254: FB25.1@95.885,87.249 95.885,86.296 C168.2@97.345,84.836 97.408,84.773 97.408,82.423 97.409,82.422 C165.1@97.409,80.137 96.012,78.74 U26.1@96.012,76.717
NetC165_2: C165.2 R101.1 R103.2 U26.2 | length 8.1
  Top Layer w0.254: R103.2@93.535,82.423 R103.2@93.725,82.423 95.758,82.423 95.759,82.422 C165.2@95.759,80.137 95.362,79.74 U26.2@95.362,76.717
NetC169_2: C169.2 U26.6 | length 5
  Top Layer w0.254: v1(94.643,70.612) 94.643,72.448 U26.6@94.712,72.517
  Bottom Layer w0.254: v1(92.329,72.263) 94.036,70.556 94.092,70.612 v1(94.643,70.612)
NetC174_1: C174.1 D53.3 R95.1 R96.2 U27.2 | length 18.5
  Top Layer w0.2: U27.2@110.16,64.671 110.16,71.17 ; v1(110.324,71.754) 110.324,73.798 110.922,74.396 R96.2@110.922,74.802 ; v1(114.3,66.421) R95.1@114.427,66.294
  Bottom Layer w0.2: v1(110.324,71.754) 112.904,71.754 114.3,70.358 v1(114.3,66.421)
NetC174_2: C174.2 D54.3 R99.2 U27.3 | length 10.8
  Top Layer w0.2: R99.2@107.671,75.047 R99.2@107.671,74.802 108.591,73.881 108.591,71.837 C174.2@108.674,71.754
  Top Layer w0.254: U27.3@108.89,64.671 C174.2@108.89,71.754
NetC181_2: C181.2 FB28.1 U28.3 | length 9.3
  Top Layer w0.254: U28.3@117.689,83.881 119.279,85.471 FB28.1@121.419,85.471 121.419,80.962 C181.2@121.736,80.645
NetC190_1: C190.1 C193.2 FB29.1 R85.2 U30.1 | length 11.7
  Top Layer w0.254: FB29.1@133.103,87.249 133.103,86.296 C193.2@134.563,84.836 134.626,84.773 134.626,82.423 R85.2@134.627,82.422 C190.1@134.627,80.137 133.23,78.74 U30.1@133.23,76.717
NetC190_2: C190.2 R85.1 R94.2 U30.2 | length 8.1
  Top Layer w0.254: R94.2@130.753,82.423 R94.2@130.873,82.423 R85.1@132.977,82.422 R85.1@132.977,82.422 C190.2@132.977,80.137 132.58,79.74 U30.2@132.58,76.717
NetC194_2: C194.2 U30.6 | length 5
  Top Layer w0.254: v1(131.861,70.612) 131.861,72.448 U30.6@131.93,72.517
  Bottom Layer w0.254: v1(129.547,72.263) 131.254,70.556 131.31,70.612 v1(131.861,70.612)
NetC210_1: C210.1 R104.1 R112.1 R190.2 U33.5 | length 12.3
  Top Layer w0.2: R190.2@189.357,24.257 189.23,24.384 R112.1@189.23,26.289 191.897,28.956 C210.1@193.167,28.956 193.295,28.956 193.295,31.369 190.818,31.369 U33.5@190.691,31.496
NetC210_2: C210.2 R104.2 R108.1 U33.8 | length 12.1
  Top Layer w0.2: R108.1@189.23,37.338 190.691,35.877 U33.8@190.691,35.306 193.04,35.306 194.881,33.465 R104.2@194.881,30.988 194.881,29.02 C210.2@194.817,28.956
NetC211_1: C211.1 R105.1 R113.1 R189.2 U34.5 | length 12.5
  Top Layer w0.2: R189.2@255.397,24.129 255.143,24.383 R113.1@255.143,26.289 257.81,28.956 C211.1@259.08,28.956 259.208,28.956 259.208,31.369 256.731,31.369 U34.5@256.604,31.496
NetC211_2: C211.2 R105.2 R109.1 U34.8 | length 12.1
  Top Layer w0.2: R109.1@255.143,37.338 256.604,35.877 U34.8@256.604,35.306 258.953,35.306 260.794,33.465 R105.2@260.794,30.988 260.794,29.02 C211.2@260.73,28.956
NetC222_1: C222.1 R112.2 R117.1 R192.2 U33.4 | length 12
  Top Layer w0.2: U33.4@185.991,31.496 183.959,31.496 R117.1@183.578,31.115 183.515,31.052 C222.1@183.515,28.956 184.913,28.956 R112.2@187.58,26.289 187.58,24.575 R192.2@187.325,24.32
NetC222_2: C222.2 R114.1 R117.2 U33.1 | length 22.9
  Top Layer w0.2: C222.2@181.865,28.956 181.928,29.019 R117.2@181.928,31.115 177.927,31.115 176.784,32.258 176.784,34.29 178.943,36.449 184.848,36.449 U33.1@185.991,35.306 187.198,36.513 R114.1@187.198,37.338
NetC223_1: C223.1 R113.2 R119.1 R191.2 U34.4 | length 12.1
  Top Layer w0.2: U34.4@251.904,31.496 249.872,31.496 R119.1@249.491,31.115 249.428,31.052 C223.1@249.428,28.956 250.826,28.956 R113.2@253.493,26.289 253.493,24.257 R191.2@253.365,24.129
NetC223_2: C223.2 R115.1 R119.2 U34.1 | length 22.9
  Top Layer w0.2: C223.2@247.778,28.956 247.841,29.019 R119.2@247.841,31.115 243.84,31.115 242.697,32.258 242.697,34.29 244.856,36.449 250.761,36.449 U34.1@251.904,35.306 253.111,36.513 R115.1@253.111,37.338
NetC224_1: C224.1 R120.1 R128.1 R186.2 U35.5 | length 12.4
  Top Layer w0.2: R186.2@210.82,24.447 210.502,24.765 R128.1@210.502,26.416 211.074,26.416 214.122,29.464 214.63,29.464 214.63,31.623 214.503,31.496 U35.5@211.9,31.496
NetC224_2: C224.2 R120.2 R124.1 U35.8 | length 11.4
  Top Layer w0.2: R124.1@210.693,37.275 211.9,36.068 U35.8@211.9,35.306 213.995,35.306 216.28,33.021 C224.2@216.28,29.464
NetC225_1: C225.1 R121.1 R129.1 R185.2 U36.5 | length 12.6
  Top Layer w0.2: R185.2@276.733,24.256 276.415,24.574 R129.1@276.415,26.416 276.987,26.416 280.035,29.464 280.543,29.464 280.543,31.623 280.416,31.496 U36.5@277.813,31.496
NetC225_2: C225.2 R121.2 R125.1 U36.8 | length 11.4
  Top Layer w0.2: R125.1@276.606,37.275 277.813,36.068 U36.8@277.813,35.306 279.908,35.306 282.193,33.021 C225.2@282.193,29.464
NetC236_1: C236.1 R128.2 R133.1 R188.2 U35.4 | length 11.9
  Top Layer w0.2: U35.4@207.2,31.496 204.787,31.496 R133.1@204.787,31.115 204.787,29.527 204.724,29.464 205.804,29.464 R128.2@208.852,26.416 208.852,24.511 R188.2@208.788,24.447
NetC236_2: C236.2 R130.1 R133.2 U35.1 | length 23.6
  Top Layer w0.2: C236.2@203.074,29.464 203.137,29.527 R133.2@203.137,31.115 203.137,31.496 198.501,31.496 197.612,32.385 197.612,34.671 199.39,36.449 206.057,36.449 U35.1@207.2,35.306 208.534,36.64 R130.1@208.534,37.275
NetC237_1: C237.1 R129.2 R135.1 R187.2 U36.4 | length 12
  Top Layer w0.2: U36.4@273.113,31.496 270.7,31.496 R135.1@270.7,31.115 270.7,29.527 270.637,29.464 271.717,29.464 R129.2@274.765,26.416 274.765,24.32 R187.2@274.701,24.256
NetC237_2: C237.2 R131.1 R135.2 U36.1 | length 23.6
  Top Layer w0.2: C237.2@268.987,29.464 269.05,29.527 R135.2@269.05,31.115 269.05,31.496 264.414,31.496 263.525,32.385 263.525,34.671 265.303,36.449 271.97,36.449 U36.1@273.113,35.306 274.447,36.64 R131.1@274.447,37.275
NetC238_1: C238.1 R136.1 R144.1 R182.2 U37.5 | length 12.1
  Top Layer w0.2: R182.2@232.029,24.447 231.774,24.702 R144.1@231.774,26.416 234.949,29.591 235.903,29.591 235.966,29.654 235.966,31.623 235.839,31.496 U37.5@233.49,31.496
NetC238_2: C238.2 R136.2 R140.1 U37.8 | length 11.9
  Top Layer w0.2: R140.1@232.156,37.465 232.156,36.64 U37.8@233.49,35.306 236.347,35.306 237.489,34.164 R136.2@237.489,31.369 C238.2@237.489,29.464
NetC239_1: C239.1 R137.1 R145.1 R181.2 U38.5 | length 12.2
  Top Layer w0.2: R181.2@297.687,24.448 R181.2@297.815,24.32 ; R145.1@297.687,26.416 300.862,29.591 301.816,29.591 301.879,29.654 301.879,31.623 301.752,31.496 U38.5@299.403,31.496
  Top Layer w0.254: R181.2@297.687,24.448 R145.1@297.687,26.416
NetC239_2: C239.2 R137.2 R141.1 U38.8 | length 11.9
  Top Layer w0.2: R141.1@298.069,37.465 298.069,36.64 U38.8@299.403,35.306 302.26,35.306 303.402,34.164 R137.2@303.402,31.369 C239.2@303.402,29.464
NetC250_1: C250.1 R144.2 R149.1 R184.2 U37.4 | length 12.3
  Top Layer w0.2: U37.4@228.79,31.496 228.663,31.623 225.996,31.623 225.996,29.591 226.949,29.591 R144.2@230.124,26.416 230.124,24.574 R184.2@229.997,24.447
NetC250_2: C250.2 R146.1 R149.2 U37.1 | length 23.6
  Top Layer w0.2: C250.2@224.41,29.337 224.41,30.988 220.091,30.988 219.202,31.877 219.202,34.544 221.361,36.703 226.949,36.703 228.346,35.306 U37.1@228.79,35.306 229.87,36.386 R146.1@229.87,37.465
NetC251_1: C251.1 R145.2 R151.1 R183.2 U38.4 | length 12.5
  Top Layer w0.2: U38.4@294.703,31.496 294.576,31.623 291.909,31.623 291.909,29.591 292.862,29.591 R145.2@296.037,26.416 R145.2@295.783,26.162
  Top Layer w0.254: R183.2@295.783,24.32 R145.2@295.783,26.162
NetC251_2: C251.2 R147.1 R151.2 U38.1 | length 23.6
  Top Layer w0.2: C251.2@290.323,29.337 290.323,30.988 286.004,30.988 285.115,31.877 285.115,34.544 287.274,36.703 292.862,36.703 294.259,35.306 U38.1@294.703,35.306 295.783,36.386 R147.1@295.783,37.465
NetC254_1: C254.1 R152.1 R156.1 R197.2 U40.5 | length 12.6
  Top Layer w0.2: R197.2@124.841,23.431 124.588,23.684 R156.1@124.588,25.654 127.255,28.321 C254.1@128.525,28.321 128.653,28.321 128.653,30.734 126.176,30.734 U40.5@126.049,30.861
NetC254_2: C254.2 R152.2 R154.1 U40.8 | length 12.1
  Top Layer w0.2: R154.1@124.588,36.703 126.049,35.242 U40.8@126.049,34.671 128.398,34.671 130.239,32.83 R152.2@130.239,30.353 130.239,28.385 C254.2@130.175,28.321
NetC260_1: C260.1 R156.2 R159.1 R198.2 U40.4 | length 12.3
  Top Layer w0.2: U40.4@121.349,30.861 119.317,30.861 R159.1@118.936,30.48 118.873,30.417 C260.1@118.873,28.321 120.271,28.321 R156.2@122.938,25.654 122.938,23.687 R198.2@122.682,23.431
NetC260_2: C260.2 R157.1 R159.2 U40.1 | length 22.9
  Top Layer w0.2: C260.2@117.223,28.321 117.286,28.384 R159.2@117.286,30.48 113.285,30.48 112.142,31.623 112.142,33.655 114.301,35.814 120.206,35.814 U40.1@121.349,34.671 122.556,35.878 R157.1@122.556,36.703
NetC261_1: C261.1 R160.1 R164.1 R195.2 U41.5 | length 12.6
  Top Layer w0.2: R195.2@146.177,23.685 145.86,24.002 R164.1@145.86,25.781 146.432,25.781 149.48,28.829 149.988,28.829 149.988,30.988 149.861,30.861 U41.5@147.258,30.861
NetC261_2: C261.2 R160.2 R162.1 U41.8 | length 11.4
  Top Layer w0.2: R162.1@146.051,36.64 147.258,35.433 U41.8@147.258,34.671 149.353,34.671 151.638,32.386 C261.2@151.638,28.829
NetC267_1: C267.1 R164.2 R167.1 R196.2 U41.4 | length 12
  Top Layer w0.2: U41.4@142.558,30.861 140.145,30.861 R167.1@140.145,30.48 140.145,28.892 140.082,28.829 141.162,28.829 R164.2@144.21,25.781 144.21,23.75 R196.2@144.145,23.685